# Altium PCB project_14.PcbDoc
Units mil, origin at the board's own origin, x right, y up, seen from the top; angles counter-clockwise.
Board outline 2720 x 2335 mil, 2 copper layers (Top Layer, Bottom Layer); 15 components, 39 nets, 100 pads, 7 vias.
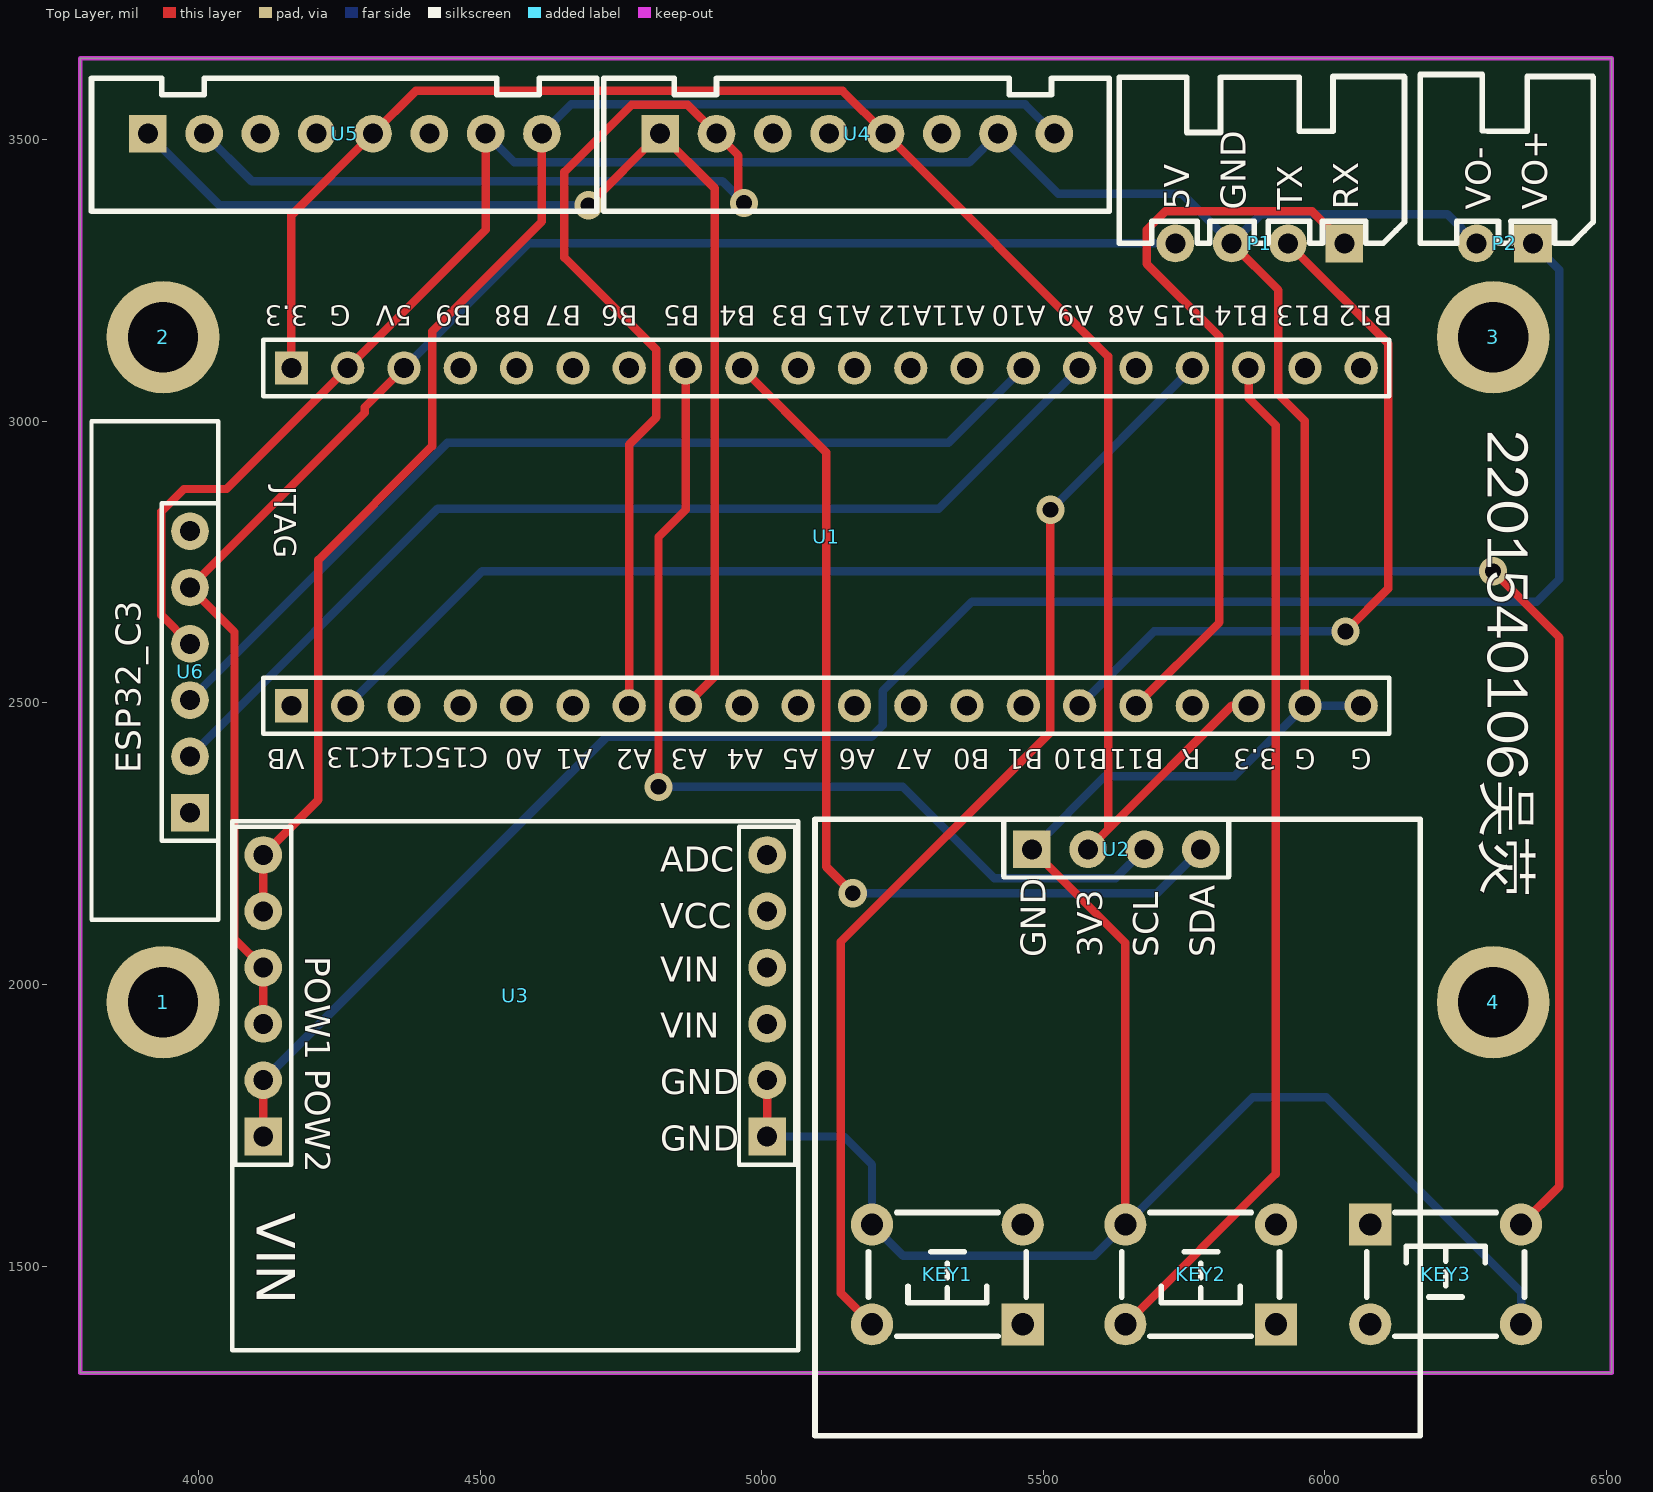
[diagram p0: Top Layer view]
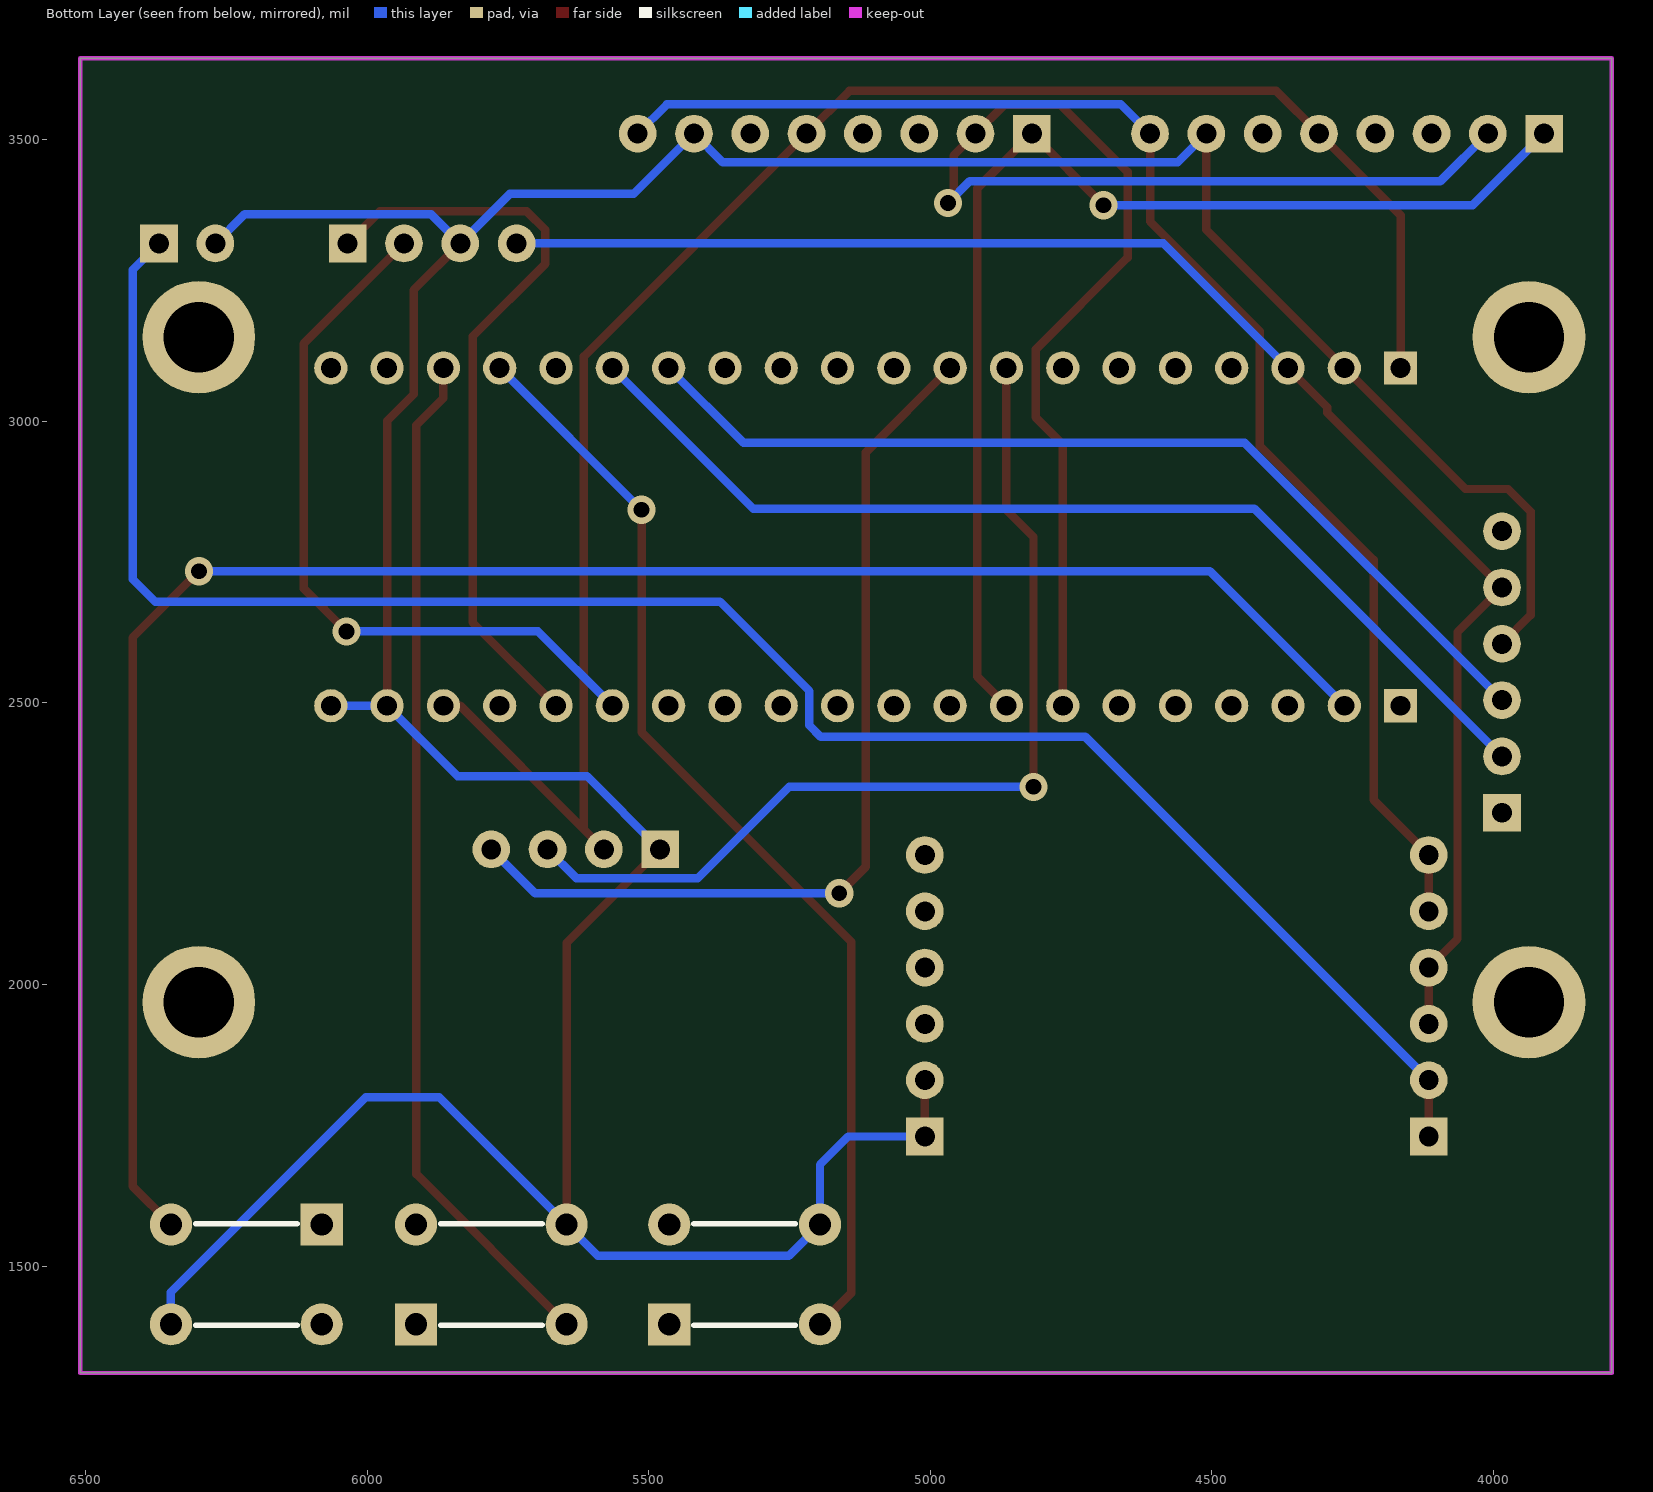
[diagram p1: Bottom Layer view, seen from below]

## Layer stack, top to bottom
Top Solder: solder mask 0.4, Solder Resist, Dk 3.5
Top Layer: signal copper 1.4
Dielectric 1: dielectric 12.6, FR-4, Dk 4.8
Bottom Layer: signal copper 1.4
Bottom Solder: solder mask 0.4, Solder Resist, Dk 3.5

## Board outline
3790,1310 3790,3645 6510,3645 6510,1310

## Design rules (kind name [scope] priority, off if disabled: settings)
Clearance [All] p1: gap=10 ignorepadtopadclearanceinfootprint=FALSE
PolygonConnect [All] p1: connectstyle=Relief reliefconductorwidth=10 reliefentries=4 polygonreliefangle="90 Angle" airgapwidth=10
RoutingVias [All] p1: holewidth=28 width=50 viastyle="Through Hole" minholewidth=28 minwidth=50 maxholewidth=28 maxwidth=50
SolderMaskExpansion [All] p1: expansion=4 istentingtop=FALSE
SupplyNets "Schematic Supply Nets_4" [InNet('12V')] p1: voltage=0.000
SupplyNets "Schematic Supply Nets_3" [InNet('5V_POW')] p2: voltage=0.000
SupplyNets "Schematic Supply Nets_2" [InNet('3V3')] p3: voltage=0.000
SupplyNets "Schematic Supply Nets_1" [InNet('5V')] p4: voltage=0.000
SupplyNets "Schematic Supply Nets" [InNet('GND')] p5: voltage=0.000
Width [All] p1: maxlimit=100 minlimit=10 preferedwidth=15 minimp=50.000000 maximp=50.000000 favimp=50.000000
30 further rules are at their usual default settings.

## Components (designator, comment, footprint, x,y, rotation, side; value= is the part's Value field where it differs from the comment)
1 "M3" "M3 125X200" 3937.01,1968.5 r90 top
2 "M3" "M3 125X200" 3937.01,3149.61 r90 top
3 "M3" "M3 125X200" 6299.21,3149.61 r90 top
4 "M3" "M3 125X200" 6299.21,1968.5 r90 top
KEY1 "mod_buttom" MOD_BUTTOM 5340,1485 r180 top
KEY2 "mod_buttom" MOD_BUTTOM 5790,1485 r180 top
KEY3 "mod_buttom" MOD_BUTTOM 6205,1485 r0 top
P1 "port_uart_4p" XH2.54_4P 5890,3471.1 r0 top
P2 "port_mot_2p" XH2.54_2P 6315,3441.1 r0 top
U1 "f1_hw_2_gw" F1_HW_2_GW 5105,2785 r180 top
U2 "mod_oled" MOD_OLED 5634.91,2238.15 r0 top
U3 "pow_hw_3" POW_HW_3 4675,1955 r270 top
U4 "mod_ZDTMotor" XH2.54-LI-8P 5170,3511.1 r0 top
U5 "mod_ZDTMotor" XH2.54-LI-8P 4260,3511.1 r0 top
U6 "c3_hw_1" C3_HW_1 3985,2555 r90 top

## Footprints (in the part's own frame and the unit in brackets; to place one, negate y for a bottom-side part, rotate by r counter-clockwise, add the part's x,y. Pads: shape width x height; smd on the part's side, far side on the other; paste and mask are expansions set on the pad)
C3_HW_1 [mm]
  rect 1.7x1.7 hole 0.9: 1(-6.35,0)
  round 1.7 hole 0.9: 2(-3.81,0) 3(-1.27,0) 4(1.27,0) 5(3.81,0) 6(6.35,0)
  silkscreen extent -11.18,-1.27 11.3,4.45, body extent -11.18,-1.27 11.3,4.45, height 8.5
F1_HW_2_GW [mm]
  rect 1.5x1.5 hole 0.9: 1(23.876,7.366) 21(23.876,-7.874)
  round 1.5 hole 0.9: 2(21.336,7.366) 3(18.796,7.366) 4(16.256,7.366) 5(13.716,7.366) 6(11.176,7.366) 7(8.636,7.366) 8(6.096,7.366) 9(3.556,7.366) 10(1.016,7.366) 11(-1.524,7.366) 12(-4.064,7.366) 13(-6.604,7.366) 14(-9.144,7.366) 15(-11.684,7.366) 16(-14.224,7.366) 17(-16.764,7.366) 18(-19.304,7.366) 19(-21.844,7.366) 20(-24.384,7.366) 22(21.336,-7.874) 23(18.796,-7.874) 24(16.256,-7.874) 25(13.716,-7.874) 26(11.176,-7.874) 27(8.636,-7.874) 28(6.096,-7.874) 29(3.556,-7.874) 30(1.016,-7.874) 31(-1.524,-7.874) 32(-4.064,-7.874) 33(-6.604,-7.874) 34(-9.144,-7.874) 35(-11.684,-7.874) 36(-14.224,-7.874) 37(-16.764,-7.874) 38(-19.304,-7.874) 39(-21.844,-7.874) 40(-24.384,-7.874)
  silkscreen extent -25.65,-9.14 25.15,8.64, body extent -26.92,-11.56 26.42,11.18, height 0.25
"M3 125X200" [mil] "M3螺丝孔，孔125Mil，焊盘200Mil"
  round 200 hole 125: 1(0,0)
MOD_BUTTOM [mm]
  rect 1.9x1.9 hole 1: 1(-3.146,2.25)
  round 1.9 hole 1: 2(-3.146,-2.25) 3(3.654,-2.25) 4(3.654,2.25)
  silkscreen extent -3.3,-2.79 3.81,2.79, body extent -3.85,-3 4.36,3, height 4.25
MOD_OLED [mm] "外购屏幕模块接口"
  rect 1.7x1.7 hole 0.9: 1(-3.935,0.047)
  round 1.7 hole 0.9: 2(-1.395,0.047) 3(1.145,0.047) 4(3.685,0.047)
  silkscreen extent -13.72,-26.4 13.58,1.4, body extent -13.72,-26.42 13.59,1.4, height 8.5
POW_HW_3 [mm]
  round 1.7 hole 0.9: 0(3.175,8.509) 1(-1.905,8.509) 1(0.635,8.509) 2(-4.445,8.509) 3(-6.985,-14.224) 3(-4.445,-14.224) 4(3.175,-14.224) 5(-1.905,-14.224) 5(0.635,-14.224) 6(-6.985,8.509)
  rect 1.7x1.7 hole 0.9: 0(5.715,8.509) 4(5.715,-14.224)
  silkscreen extent -8.51,-15.62 15.37,9.91, body extent -8.51,-15.62 15.37,9.91, height 8.5
XH2.54-LI-8P [mm] "接插件，8P"
  rect 1.7x1.7 hole 0.9: 1(-8.89,0)
  round 1.7 hole 0.9: 2(-6.35,0) 3(-3.81,0) 4(-1.27,0) 5(1.27,0) 6(3.81,0) 7(6.35,0) 8(8.89,0)
  silkscreen extent -11.43,-3.5 11.36,2.5, body extent -11.39,-3.3 11.39,2.4, height 7.05
XH2.54_2P [mm]
  rect 1.7x1.7 hole 0.9: 1(1.397,-3.175)
  round 1.7 hole 0.9: 2(-1.143,-3.175)
  silkscreen extent -3.68,-3.17 4.11,4.44, body extent -3.64,-3.52 3.9,4.17, height 5.73
XH2.54_4P [mm]
  rect 1.7x1.7 hole 0.9: 1(3.683,-3.937)
  round 1.7 hole 0.9: 2(1.143,-3.937) 3(-1.397,-3.937) 4(-3.937,-3.937)
  silkscreen extent -6.48,-3.94 6.4,3.59, body extent -6.44,-4.29 6.18,3.41, height 5.73

## Part data
1 2 3 4: library part prot_m3, "m3铜柱孔", BOM名称=铜柱孔, 学习资源=www.ooocke.com, 版权归属=源创客
KEY1 KEY2 KEY3: "6*6*4.3按键"
P1: "串口接口/SPP蓝牙模块 / XH2.54弯排针4p/4p排母"
P2: "开环直流电机接口 / XH2.54弯排针2p"
U2: "oled模块 / 4p排母"
U3: "两路降压电源模块"
U4 U5: "闭环步进,10-29V"
U6: "ESP32C3蓝牙模块 / 6p排母"

## Via types
v1: diameter 50, hole 28, Top Layer to Bottom Layer, 7 vias

## Nets (pads, with @x,y where several pads share a name; then routed paths per layer and width w, separated by ;. In a path a pad name is that pad's centre, name@x,y a point inside that pad or via, vN(x,y) a via of type N, cw(c..) or ccw(c..) an arc to the next point about the centre after c; other vN are vias at no path point)
3V3: U1.18 U1.21 U2.2 U4.5 U5.5 | length 3239.1
  Top Layer w15: U1.21 4165,3366.1 U5.5 4385.97,3587.07 5144.03,3587.07 U4.5 5615.5,3115.6 5615.5,2275.5 ; U2.2 5615.5,2275.5 ; U1.18 5835,2495 5615.5,2275.5
5V: P1.4 U1.23 U3.5 U6.5 | length 2837.8
  Top Layer w15: U3.5@4115,1930 4115,2030 4064,2081 4064,2626 U6.5 4295,3015 4295,3025 U1.23
  Bottom Layer w15: U1.23 4586.1,3316.1 P1.4
5V_POW: P2.1 U3.4 | length 3422
  Top Layer w15: U3.4@4115,1730 U3.4@4115,1830
  Bottom Layer w15: U3.4@4115,1830 4725,2440 5195,2440 5215,2460 5215,2521 5374,2680 6377,2680 6417,2720 6417,3269.1 P2.1
12V: U3.3 U4.8 U5.8 | length 2539.1
  Top Layer w15: U3.3@4115,2130 4115,2230 4213,2328 4213,2754 4415,2956 4415,3160 4610,3355 U5.8
  Bottom Layer w15: U5.8 4661.9,3563 5468.1,3563 U4.8
GND: KEY1.3 KEY2.3 KEY3.3 P1.3 P2.2 U1.19 U1.20 U1.22 U2.1 U3.0 U4.7 U5.7 U6.4 | length 7343.8
  Top Layer w15: U6.4 3934,2656 3934,2840 3974,2880 4050,2880 U1.22 4510,3340 U5.7 ; U3.0@5010,1730 U3.0@5010,1830 ; U2.1 5646.14,2073.86 KEY2.3 ; P1.3 5917.97,3233.13 5917.97,3048 5965,3000.97 U1.19
  Bottom Layer w15: U5.7 4561.1,3460 5368.9,3460 U4.7 5527.1,3404 5747.1,3404 P1.3 5886.9,3368 6218.1,3368 P2.2 ; U3.0@5010,1730 5146.14,1730 5196.14,1680 KEY1.3 5251.72,1518 5590.56,1518 KEY2.3 5872.56,1800 6002.56,1800 6348.86,1453.7 KEY3.3 ; U2.1 5610,2370 5840,2370 U1.19 U1.20
NRST: U1.17
PA0: U1.5
PA1: U1.6
PA2: U1.7 U4.2 U5.2 | length 2529.3
  Top Layer w15: U1.7 4765,2959 4813,3007 4813,3128 4650,3291 4650,3443.07 4769,3562.07 4869.03,3562.07 U4.2 4959,3472.1 4959,3398 v1(4969,3388)
  Bottom Layer w15: U5.2 4094.6,3426.5 4930.5,3426.5 v1(4969,3388)
PA3: U1.8 U4.1 U5.1 | length 2093.1
  Top Layer w15: v1(4692.9,3384) U4.1 4917,3414.1 4917,2547 U1.8
  Bottom Layer w15: U5.1 4037.1,3384 v1(4692.9,3384)
PA4: U1.9
PA5: U1.10
PA6: U1.11
PA7: U1.12
PA8: U1.36
PA9: U1.35 U6.2 | length 1865.8
  Bottom Layer w15: U6.2 4425,2845 5315,2845 U1.35
PA10: U1.34 U6.3 | length 1724.4
  Bottom Layer w15: U6.3 4442,2962 5332,2962 U1.34
PA11: U1.33
PA12: U1.32
PA15: U1.31
PB0: U1.13
PB1: U1.14
PB3: U1.30
PB4: U1.29 U2.4 | length 1664.9
  Top Layer w15: U1.29 5115,2945 5115,2209 v1(5162,2162)
  Bottom Layer w15: v1(5162,2162) 5702,2162 U2.4
PB5: U1.28 U2.3 | length 1715.1
  Top Layer w15: v1(4817,2351) 4817,2795 4865,2843 U1.28
  Bottom Layer w15: v1(4817,2351) 5251,2351 5413,2189 5629,2189 U2.3
PB6: U1.27
PB7: U1.26
PB8: U1.25
PB9: U1.24
PB10: P1.2 U1.15 | length 1321
  Top Layer w15: P1.2 6113,3138.1 6113,2703 v1(6037,2627)
  Bottom Layer w15: U1.15 5697,2627 v1(6037,2627)
PB11: P1.1 U1.16 | length 1348
  Top Layer w15: U1.16 5813,2643 5813,3151 5684,3280 5684,3340 5717,3373 5978.1,3373 P1.1
PB12: U1.40
PB13: U1.39
PB14: KEY2.4 U1.38 | length 1829
  Top Layer w15: KEY2.4 5913,1663.28 5913,2993.33 5865,3041.33 U1.38
PB15: KEY1.4 U1.37 | length 1979.9
  Top Layer w15: KEY1.4 5141,1451.56 5141,2076 5513,2448 v1(5513,2843)
  Bottom Layer w15: v1(5513,2843) U1.37
PC13: KEY3.4 U1.2 | length 3370.5
  Top Layer w15: v1(6299,2734) 6417,2616 6417,1641.72 KEY3.4
  Bottom Layer w15: U1.2 4504,2734 v1(6299,2734)
PC14: U1.3
PC15: U1.4
VBAT: U1.1
pads on no net: 1.1 2.1 3.1 4.1 KEY1.1 KEY1.2 KEY2.1 KEY2.2 KEY3.1 KEY3.2 U3.1 U3.2 U3.6 U4.3 U4.4 U4.6 U5.3 U5.4 U5.6 U6.1 U6.6

## Keep-outs
Keep-Out Layer:
  the board outline again, w7.87

## Silkscreen, mask and mechanical layers (free items; w line width, h text height)
Top Overlay:
  text "2201540106吴荧" at 6265,2985 h130 r270

## Text inside footprints (layer, text, board x,y; h text height)
P1: Top Overlay "RX" at 6060,3376.1 h45 r90; Top Overlay "TX" at 5960,3376.1 h45 r90; Top Overlay "GND" at 5860,3376.1 h45 r90; Top Overlay "5V" at 5760,3376.1 h45 r90
P2: Top Overlay "VO-" at 6295,3376.1 h45 r90; Top Overlay "VO+" at 6395,3376.1 h45 r90
U1: Top Overlay "JTAG" at 4135,2885 h39.37 r270; Top Overlay "R" at 5780,2418 h35.43 r180; Top Overlay "B11" at 5714,2418 h35.43 r180; Top Overlay "B10" at 5615,2418 h35.43 r180; Top Overlay "B1" at 5500,2418 h35.43 r180; Top Overlay "B0" at 5405,2418 h35.43 r180; Top Overlay "A0" at 4610,2418 h35.43 r180; Top Overlay "A1" at 4699,2418 h35.43 r180; Top Overlay "A2" at 4805.71,2418 h35.43 r180; Top Overlay "A3" at 4903.57,2418 h35.43 r180; Top Overlay "A4" at 5003,2418 h35.43 r180; Top Overlay "A5" at 5101,2418 h35.43 r180; Top Overlay "A6" at 5202,2418 h35.43 r180; Top Overlay "A7" at 5302,2418 h35.43 r180; Top Overlay "VB" at 4189,2418 h35.43 r180; Top Overlay "3.3" at 5915,2418 h35.43 r180; Top Overlay "G" at 5984,2418 h35.43 r180; Top Overlay "G" at 6084,2418 h35.43 r180; Top Overlay "B12" at 6120,3205 h35.43 r180; Top Overlay "B13" at 6010,3205 h35.43 r180; Top Overlay "B14" at 5900,3205 h35.43 r180; Top Overlay "B15" at 5790,3205 h35.43 r180; Top Overlay "A8" at 5680,3205 h35.43 r180; Top Overlay "A9" at 5590,3205 h35.43 r180; Top Overlay "A10" at 5505,3205 h35.43 r180; Top Overlay "A11" at 5397,3205 h35.43 r180; Top Overlay "A12" at 5302,3205 h35.43 r180; Top Overlay "A15" at 5194,3205 h35.43 r180; Top Overlay "B3" at 5082,3205 h35.43 r180; Top Overlay "B4" at 4990,3205 h35.43 r180; Top Overlay "B5" at 4890,3205 h35.43 r180; Top Overlay "B6" at 4780,3205 h35.43 r180; Top Overlay "B7" at 4680,3205 h35.43 r180; Top Overlay "B8" at 4590,3205 h35.43 r180; Top Overlay "B9" at 4485,3205 h35.43 r180; Top Overlay "5V" at 4380,3205 h35.43 r180; Top Overlay "G" at 4270,3205 h35.43 r180; Top Overlay "3.3" at 4195,3205 h35.43 r180; Top Overlay "C15C14C13" at 4515,2420 h35.43 r180
U2: Top Overlay "GND" at 5504.91,2048.15 h45 r90; Top Overlay "SDA" at 5804.91,2048.15 h45 r90; Top Overlay "SCL" at 5704.91,2048.15 h45 r90; Top Overlay "3V3" at 5604.91,2048.15 h45 r90
U3: Top Overlay "POW1" at 4190,2050 h45 r270; Top Overlay "POW2" at 4190,1850 h45 r270; Top Overlay "GND" at 4820,1805 h45; Top Overlay "GND" at 4820,1705 h45; Top Overlay "VIN" at 4820,2005 h45; Top Overlay "VIN" at 4820,1905 h45; Top Overlay "ADC" at 4820,2200 h45; Top Overlay "VCC" at 4820,2100 h45; Top Overlay "VIN" at 4080,1594.92 h118.11 r270
U6: Top Overlay "ESP32_C3" at 3897.5,2375 h45 r90